# Altium PCB CanSat ADCS.PcbDoc
Units mm, origin at the board's own origin, x right, y up, seen from the top; angles counter-clockwise.
Board outline 50 x 50 mm, 4 copper layers (Top Layer, Ground, Power, Bottom Layer), stack 1.641 mm thick; 49 components, 53 nets, 273 pads, 89 vias.
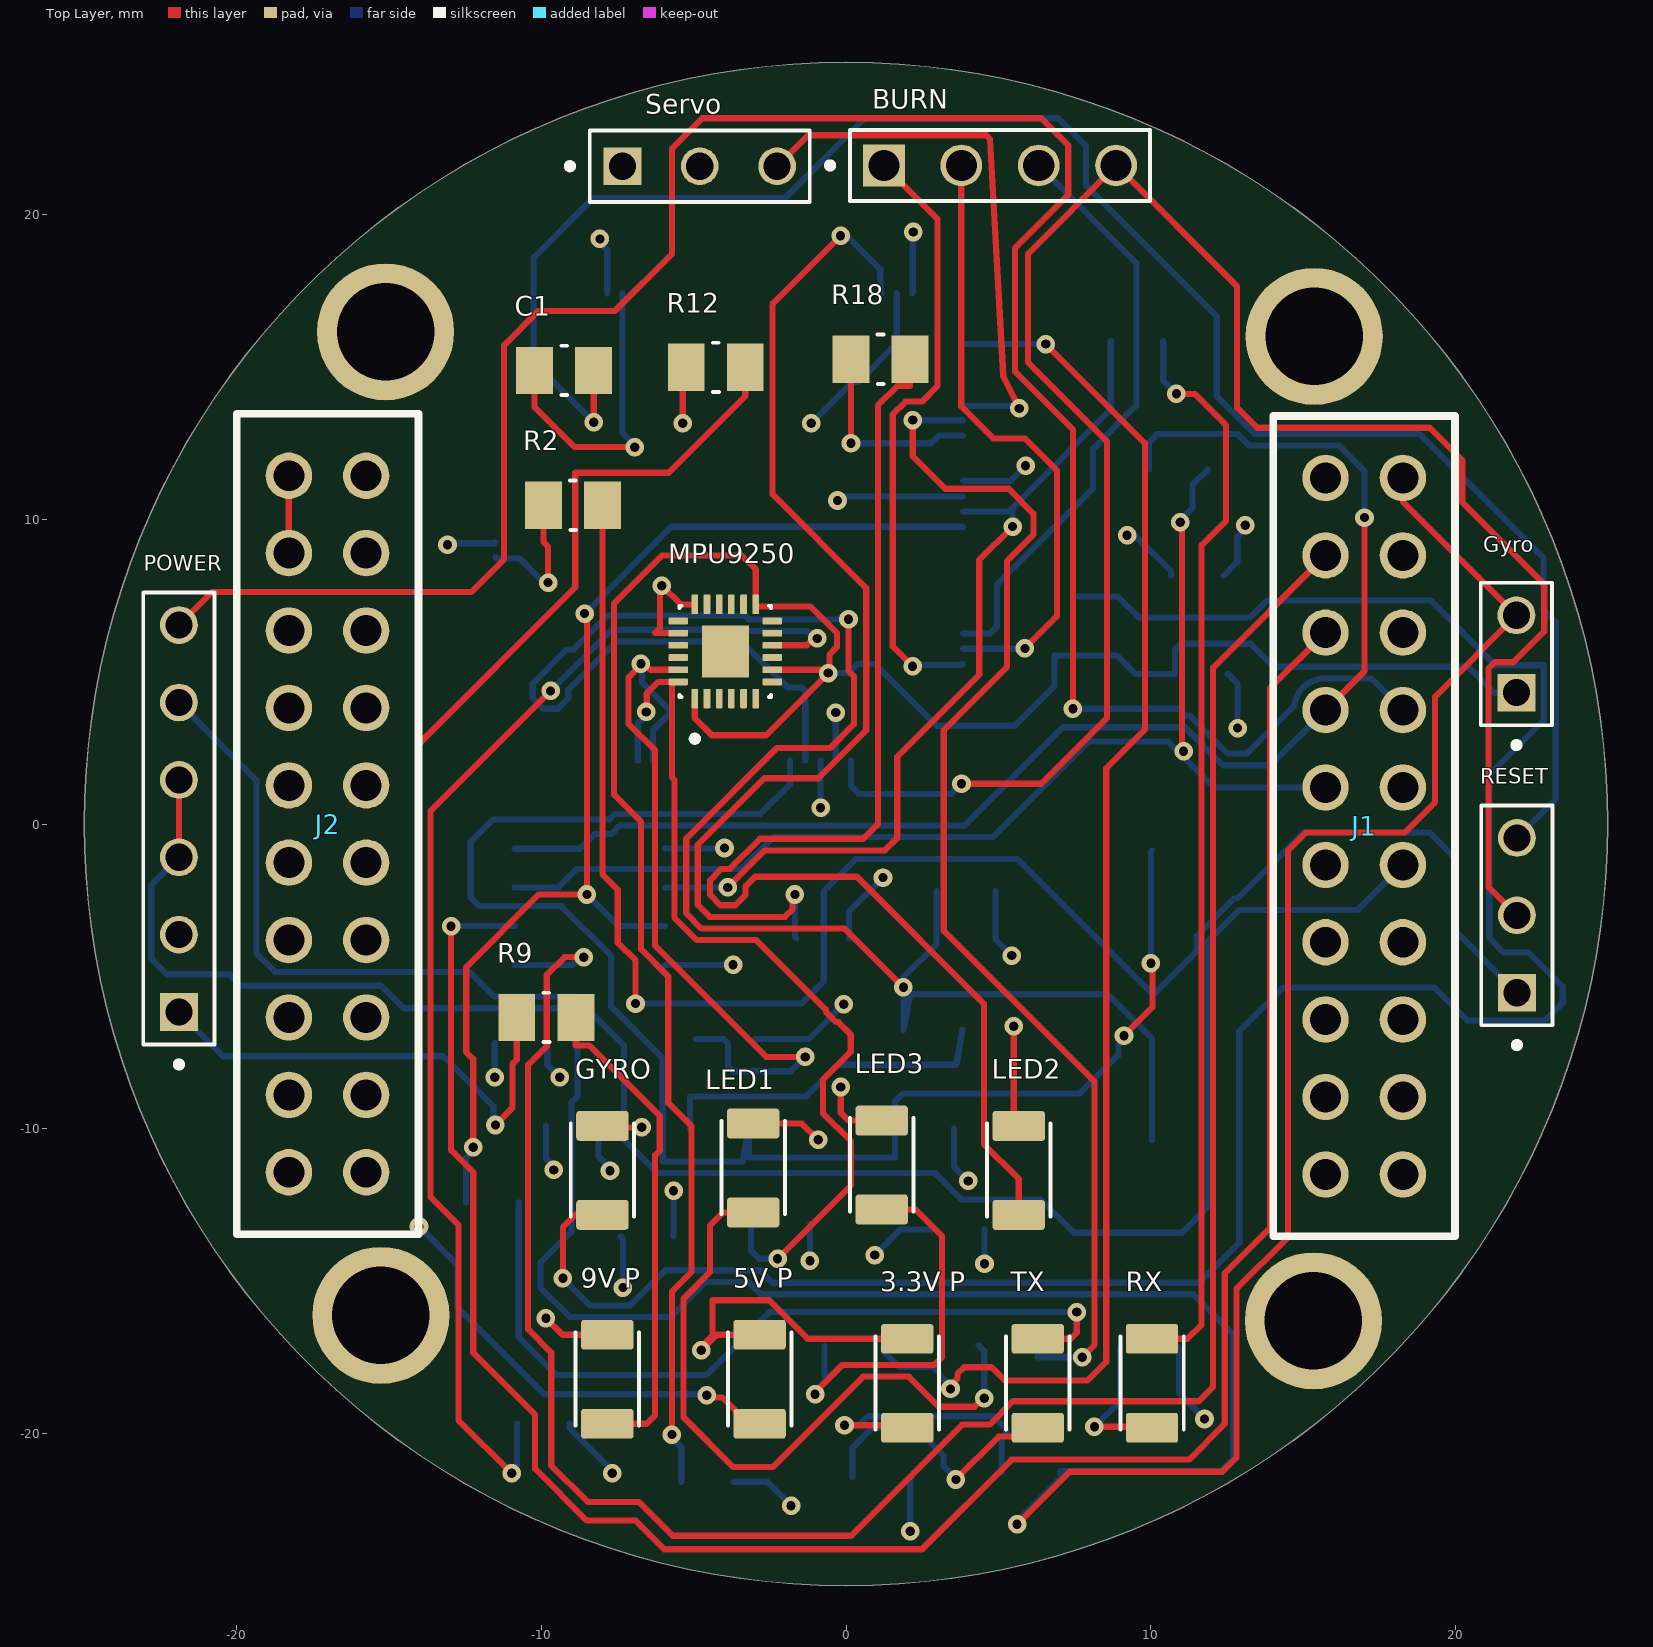
[diagram p0: Top Layer view]
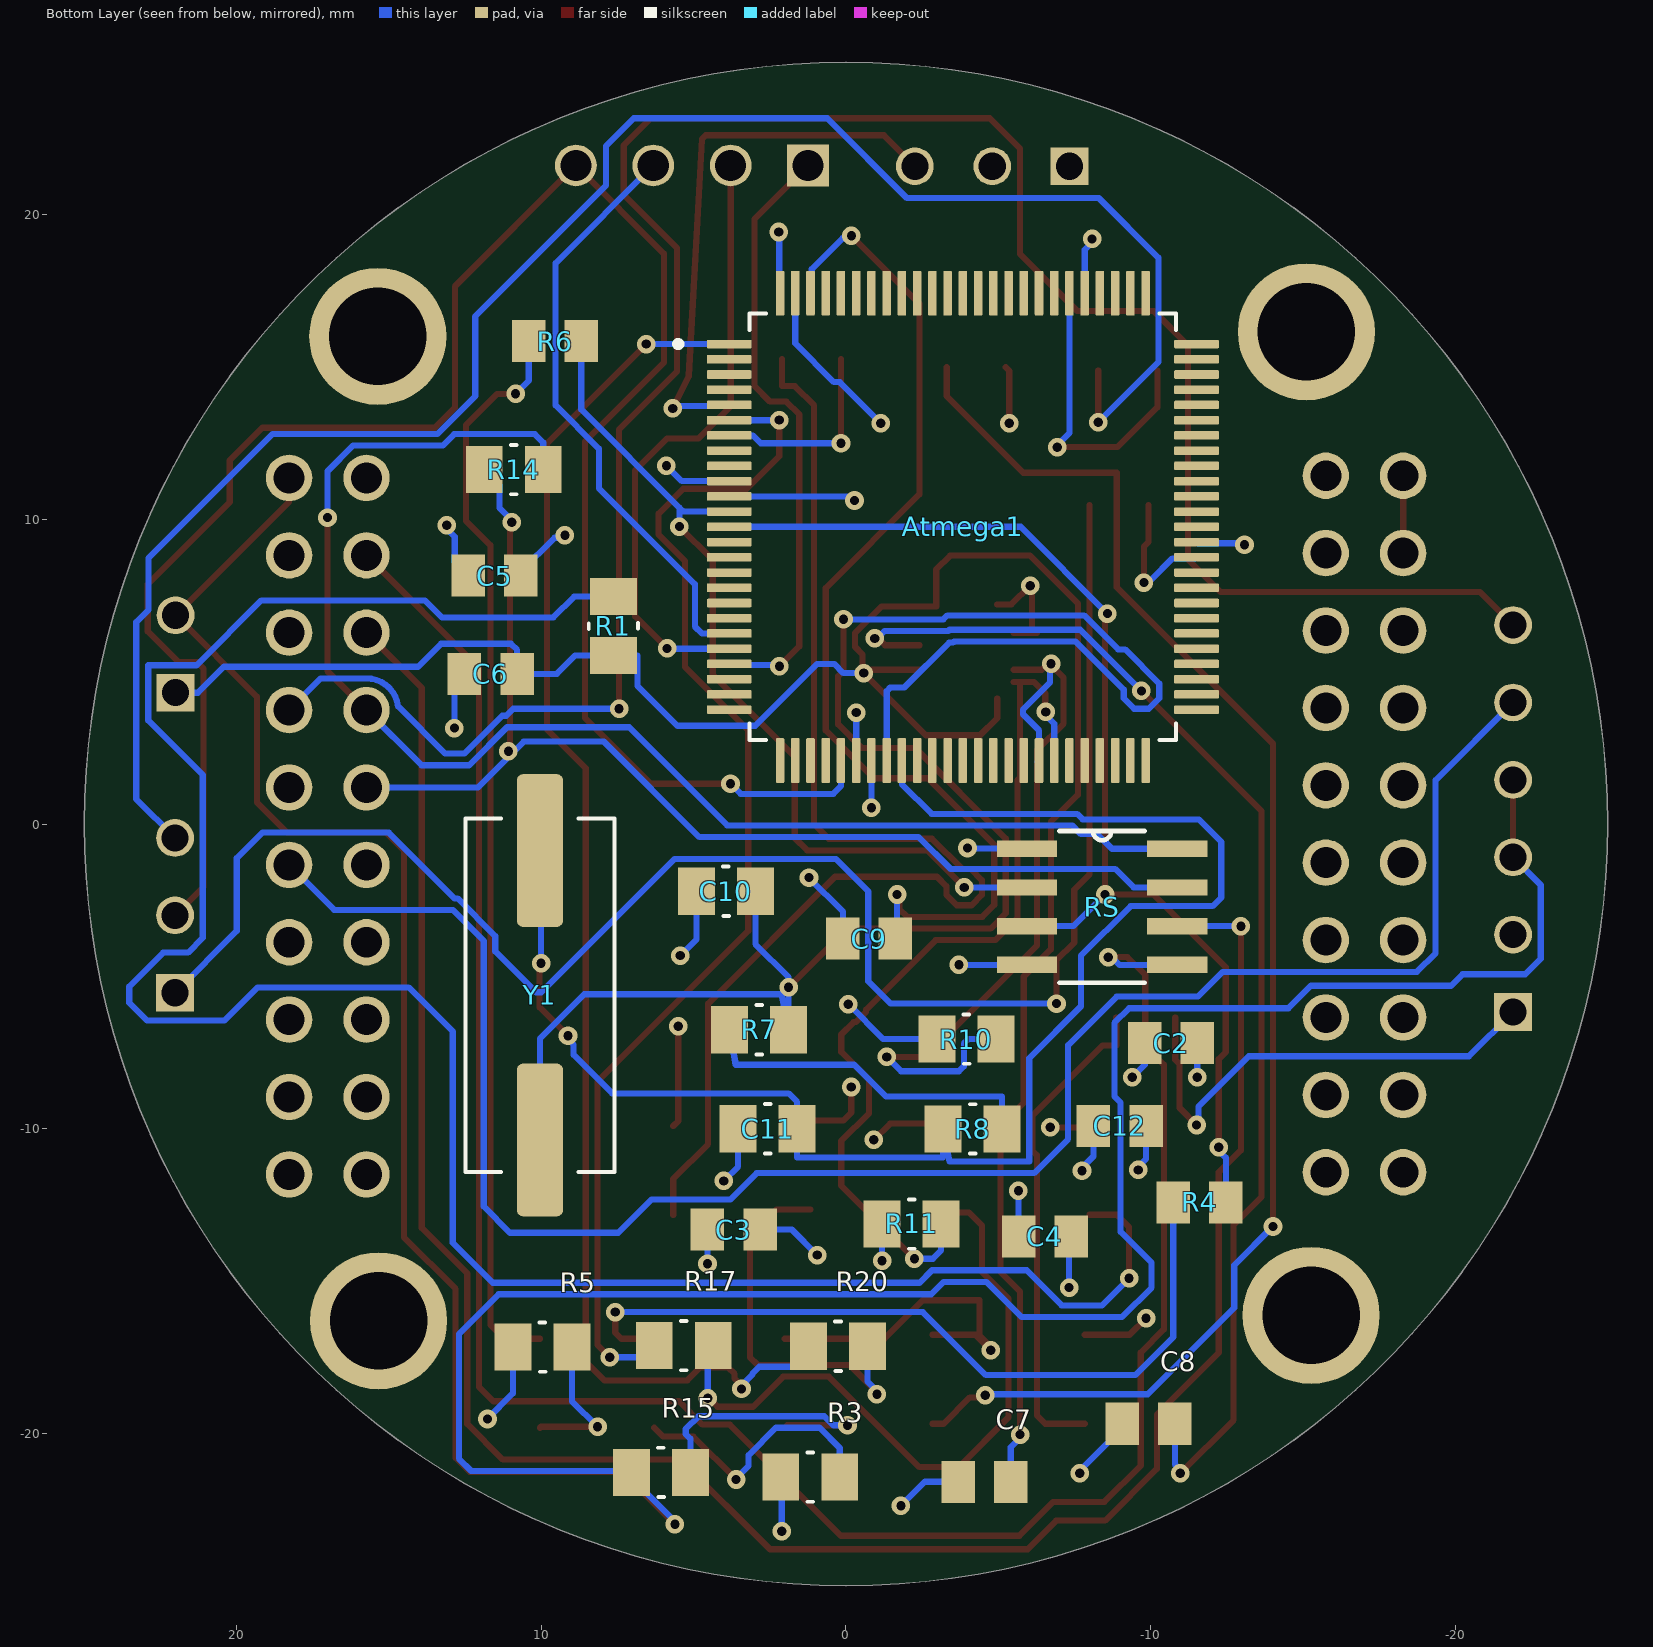
[diagram p1: Bottom Layer view, seen from below]
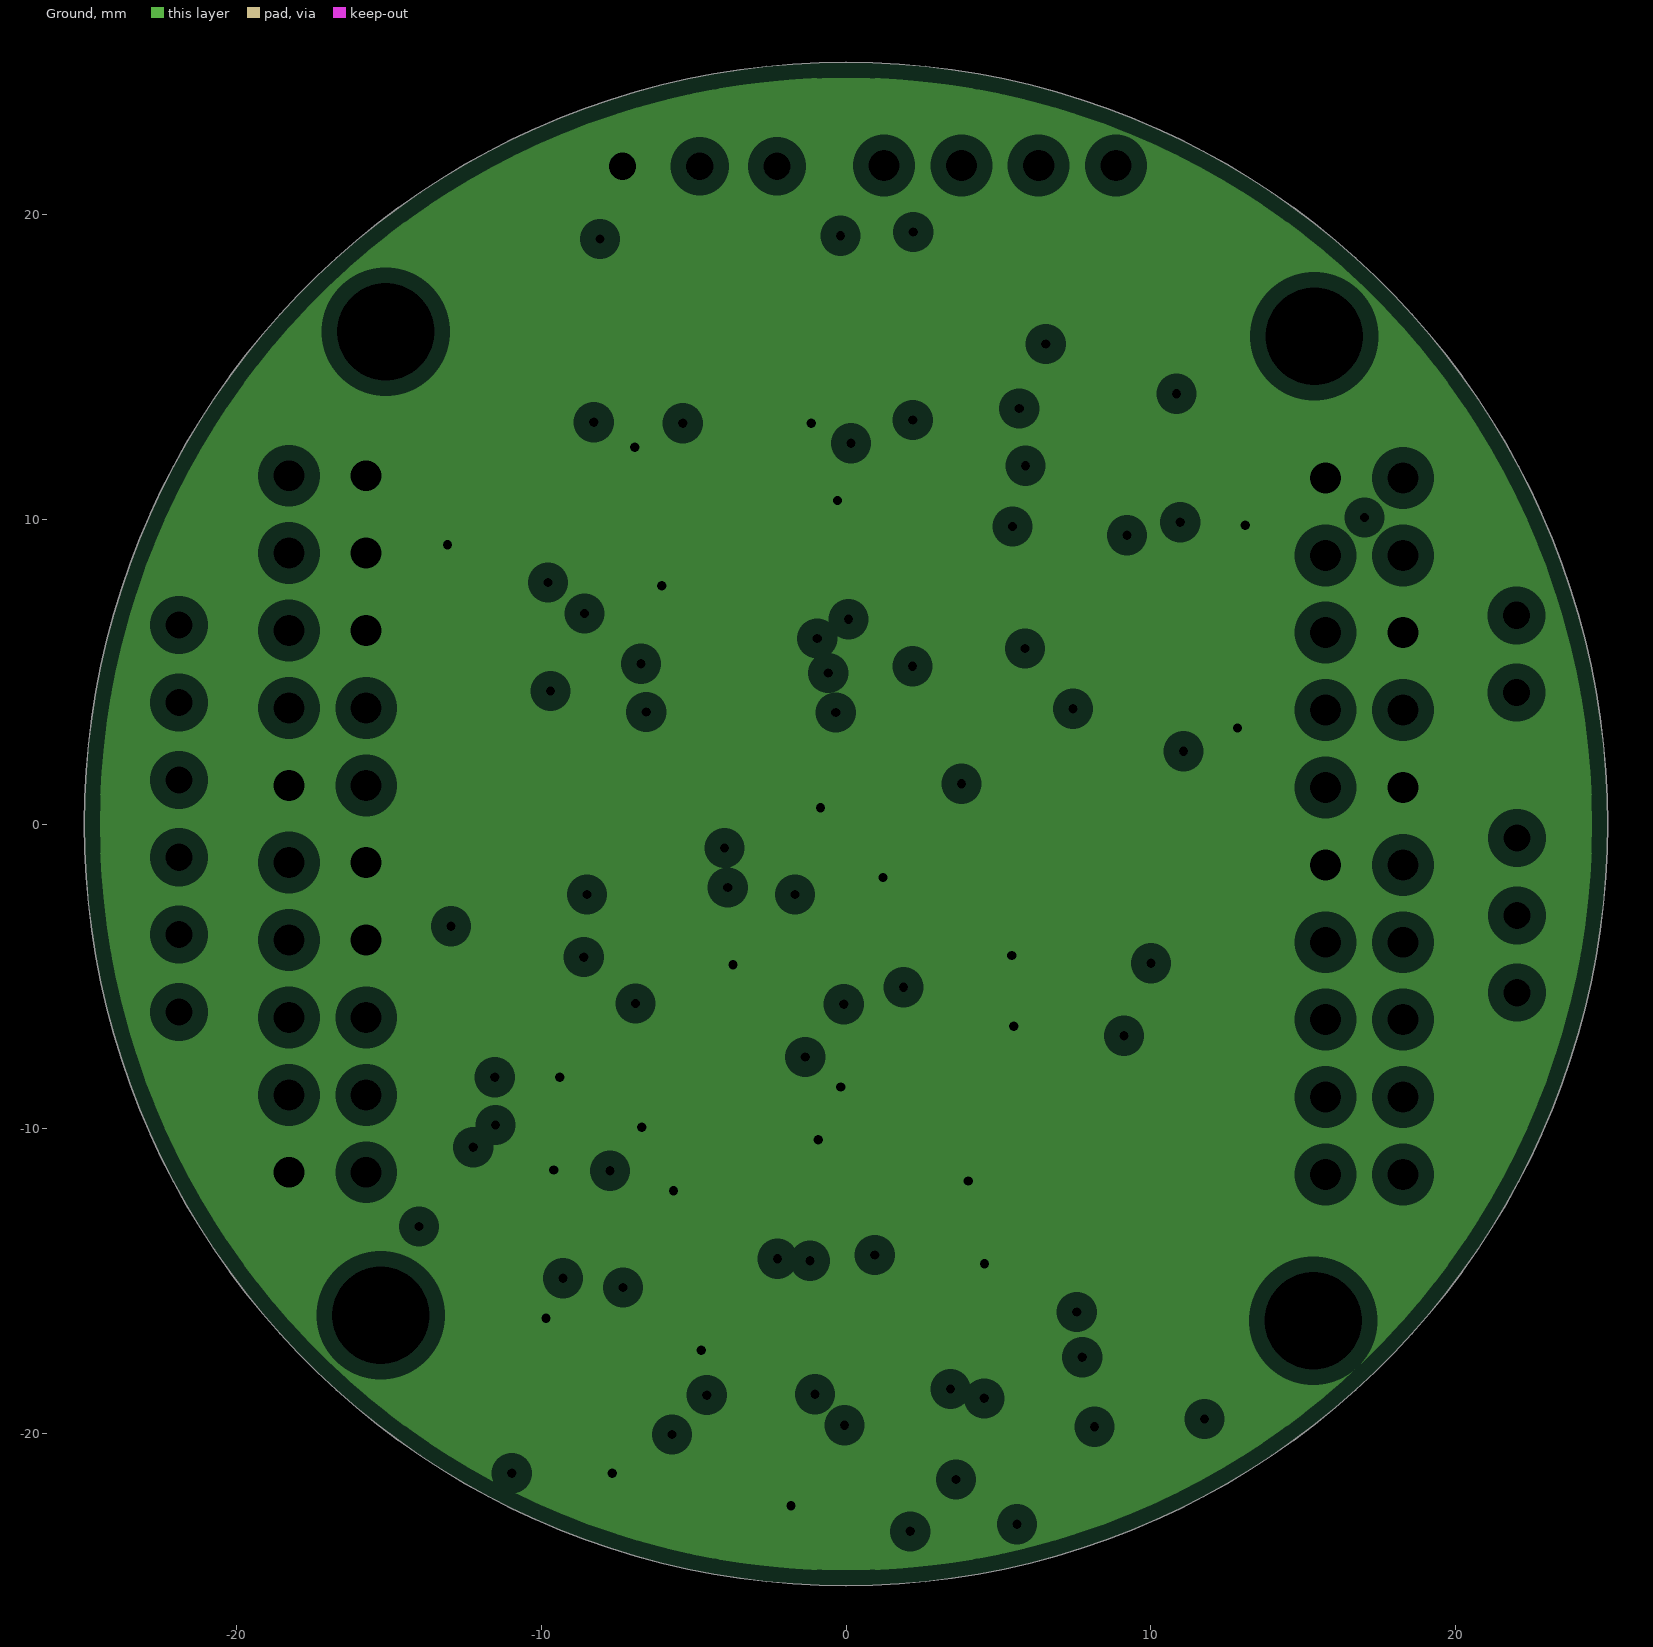
[diagram p2: Ground, clearances drawn from the general rule]
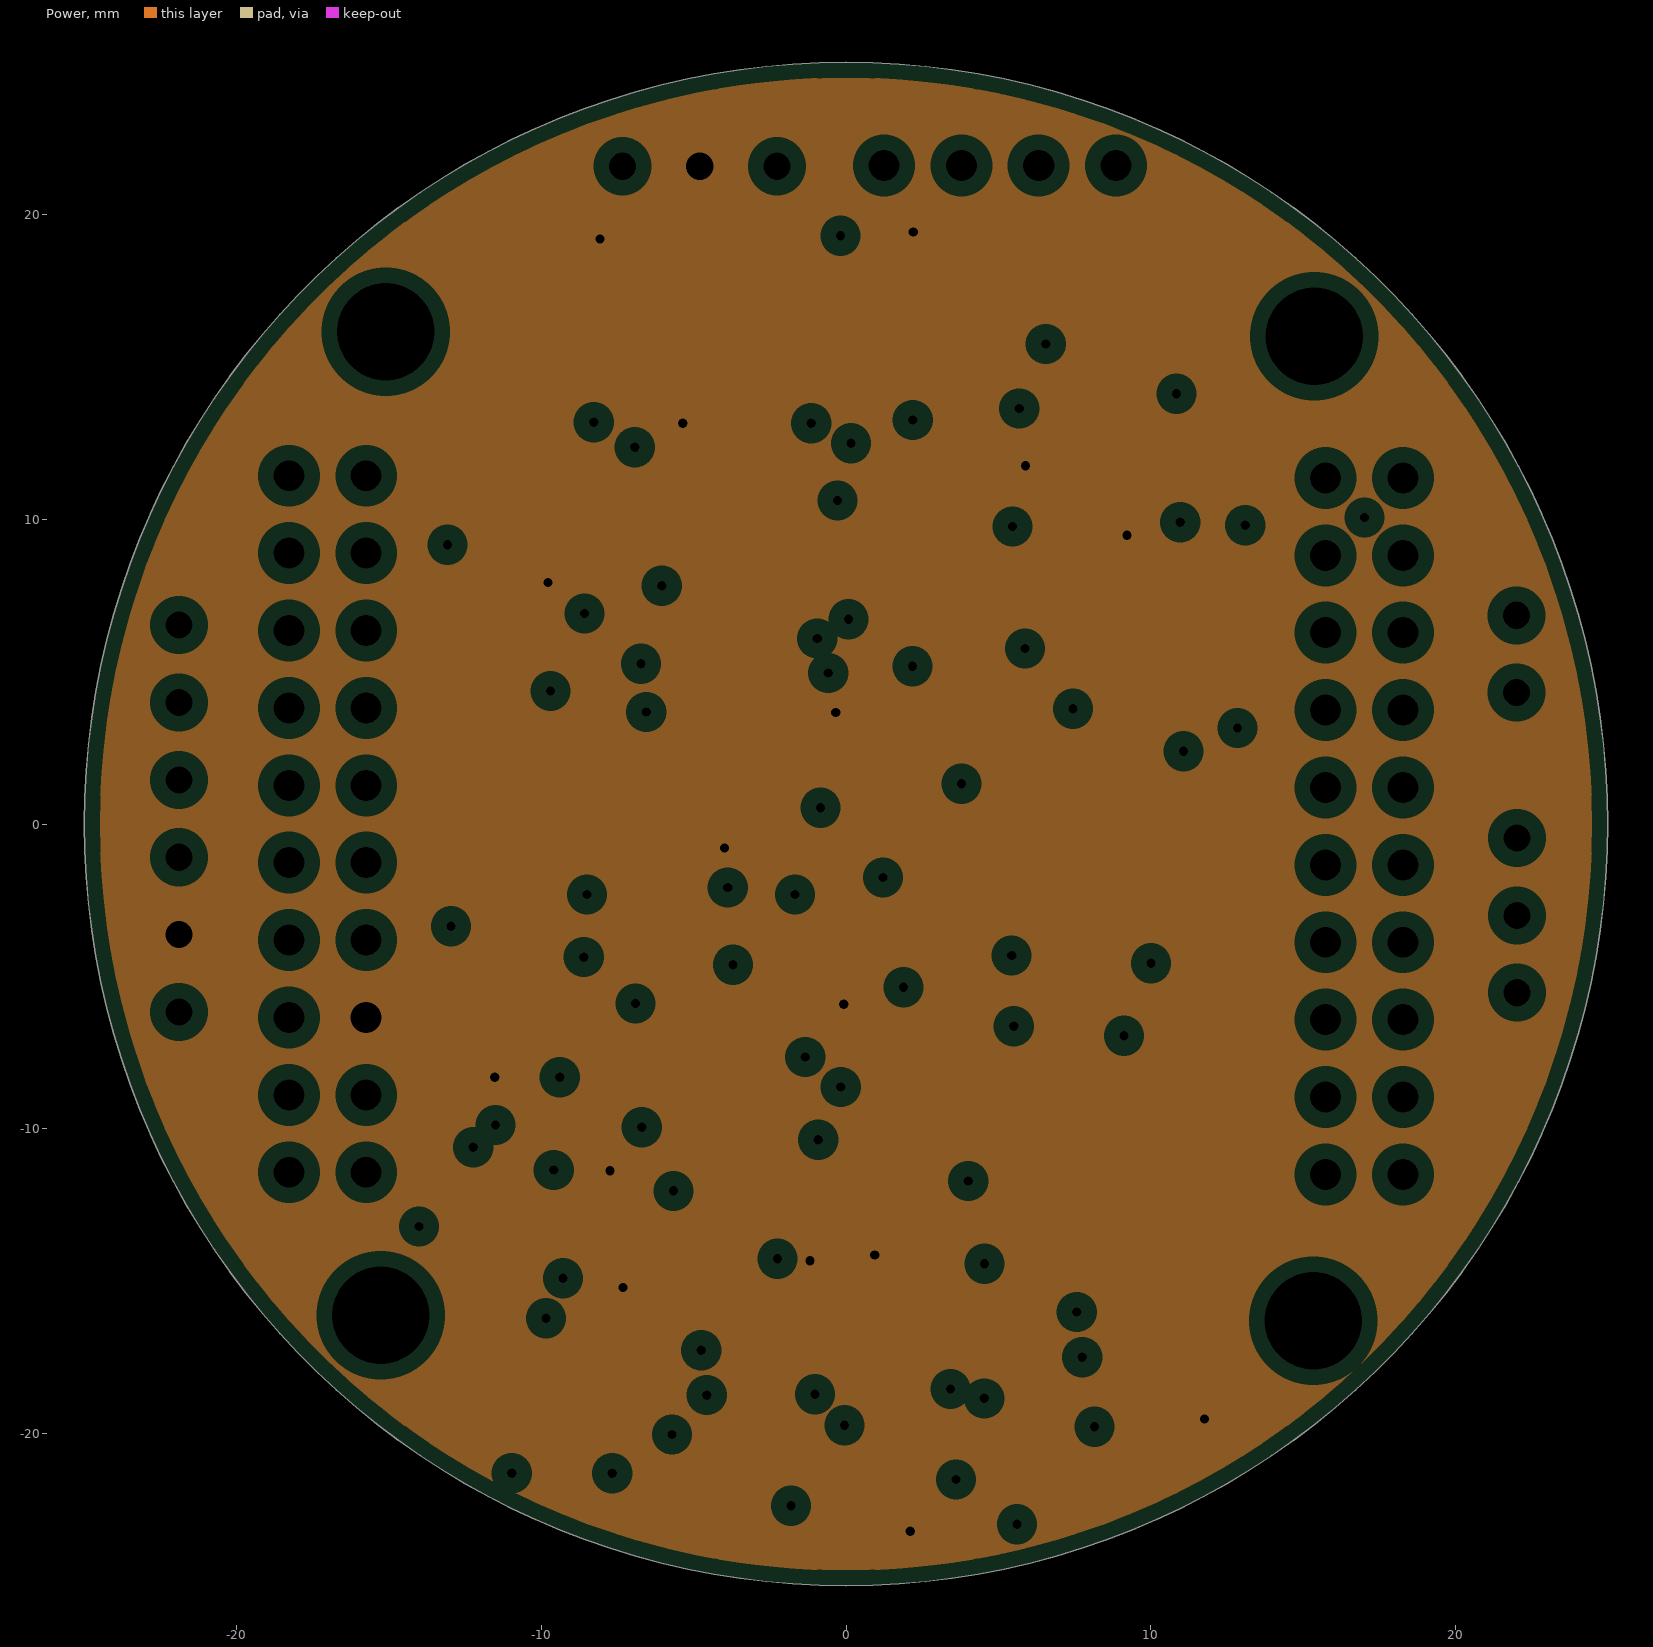
[diagram p3: Power, clearances drawn from the general rule]
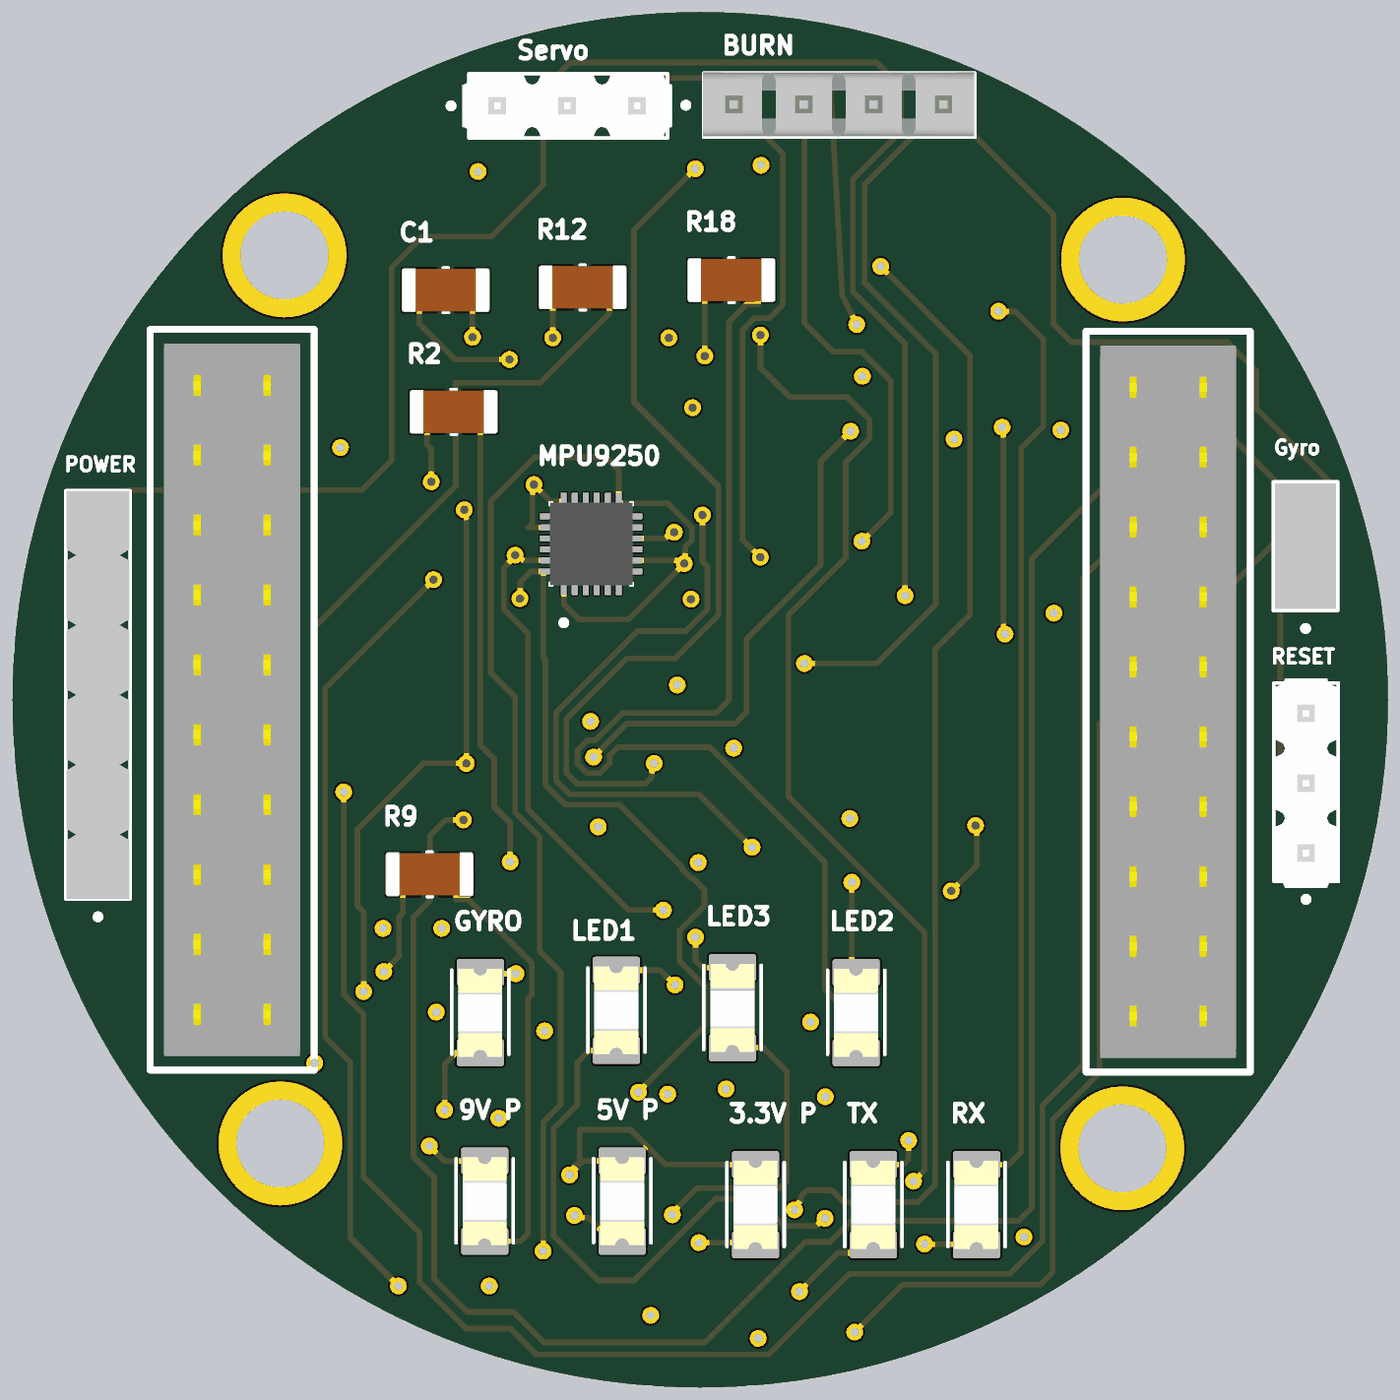
[diagram p4: 3D render of the assembled board from above, using the file's embedded part models]
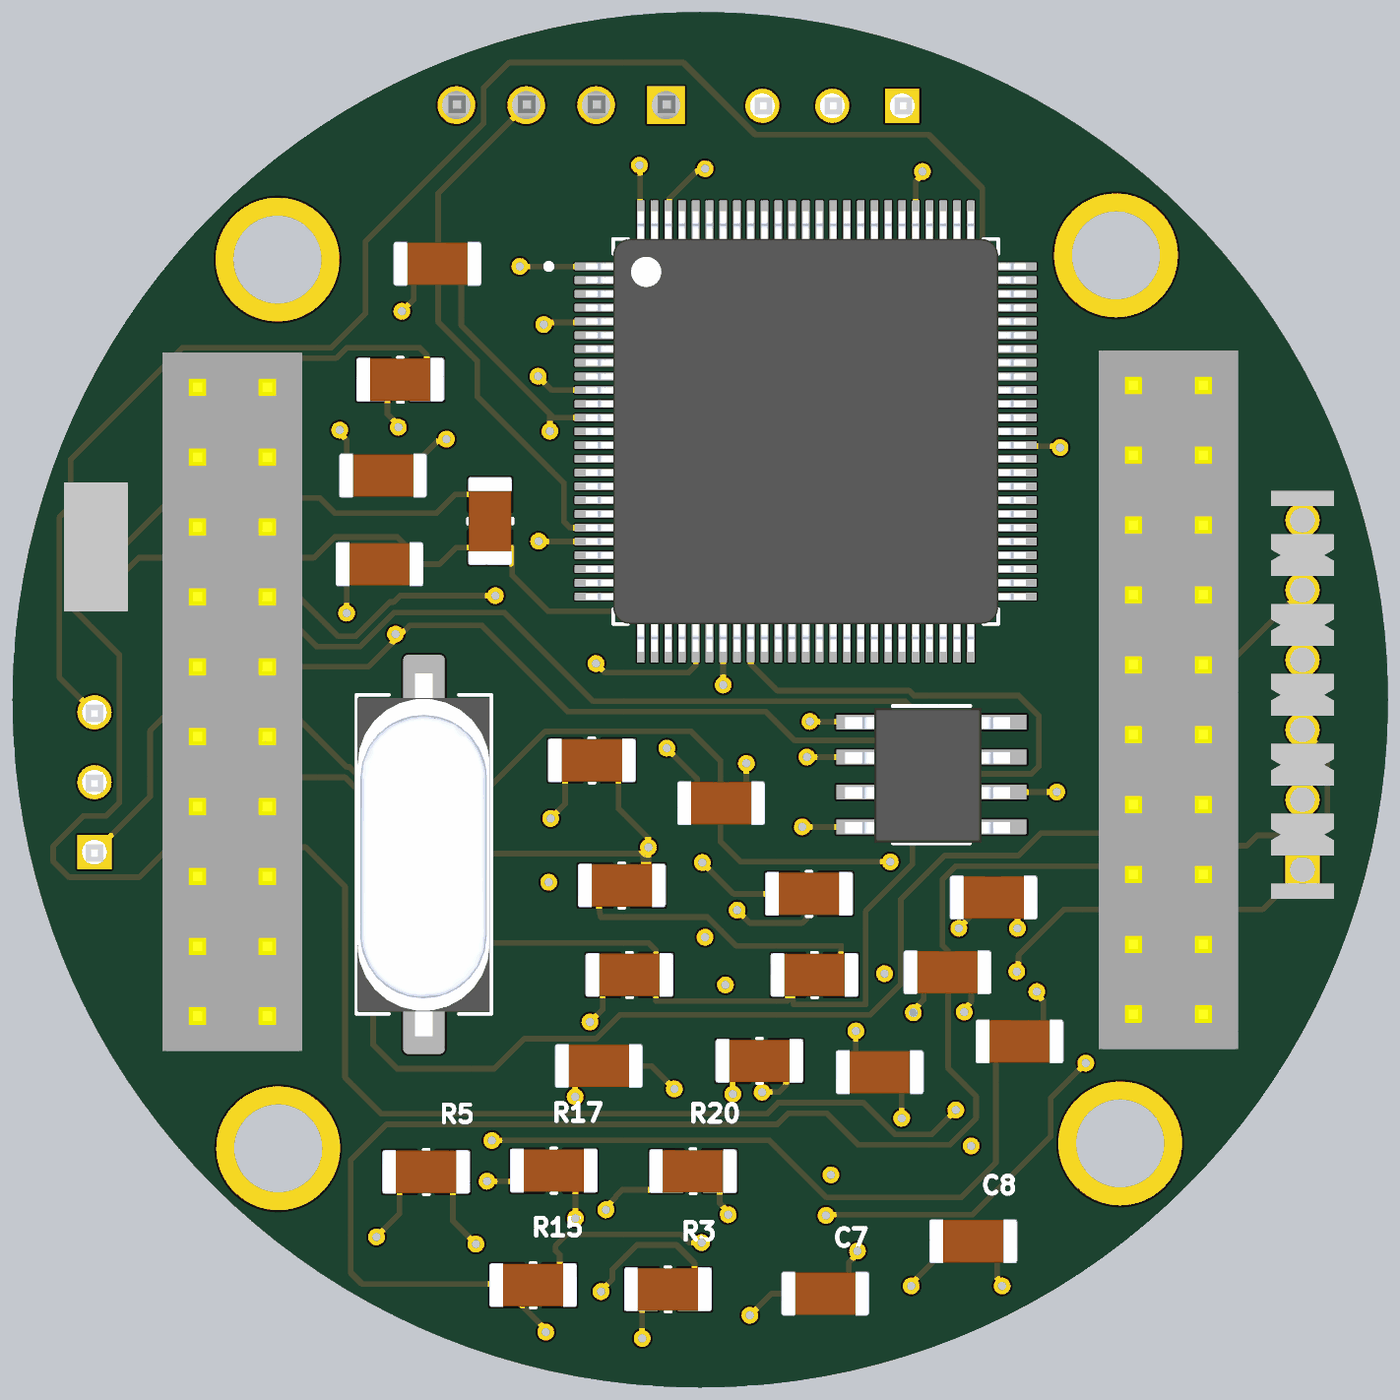
[diagram p5: 3D render of the assembled board from below, using the file's embedded part models]

## Layer stack, top to bottom
Top Solder: solder mask 0.0102, Solder Resist, Dk 3.5
Top Layer: signal copper 0.0356
Dielectric 1: prepreg 0.1702, FR-4, Dk 4.35
Ground: plane copper 0.0178, net G
Dielectric 3: core 1.1938, FR-4, Dk 4.35
Power: plane copper 0.0178, net VCC-5V(ADCS)
Dielectric 2: prepreg 0.1702, FR-4, Dk 4.35
Bottom Layer: signal copper 0.0356
Bottom Solder: solder mask 0.0102, Solder Resist, Dk 3.5

## Board outline
-0.001,-25 cw(c-0.001,0) -25.001,0 cw(c-0.001,0) -0.001,25 cw(c-0.001,0) 24.999,0 cw(c-0.001,0)

## Design rules (kind name [scope] priority, off if disabled: settings)
Clearance [All] p1: gap=0.178 ignorepadtopadclearanceinfootprint=FALSE except(0: Arc-Hole Track-Hole SMDPad-Hole THPad-Hole Via-Hole Fill-Hole Poly-Hole Region-Hole Text-Hole)
ComponentClearance [All] p1: gap=0.762 collisioncheckmode=3 verticalgap=0.762 showdistances=FALSE
DiffPairsRouting [All] p1: maxlimit=0.254 minlimit=0.254 mostfreqgap=0.254 toplayer_minwidth=0.381 toplayer_maxwidth=0.381 toplayer_prefwidth=0.381 bottomlayer_minwidth=0.381 bottomlayer_maxwidth=0.381 bottomlayer_prefwidth=0.381 substack1={0761D619-B0FF-4D42-81BD-1B94FE1A46B2} toplayer_{0761d619-b0ff-4d42-81bd-1b94fe1a46b2}_minwidth=0.381 toplayer_{0761d619-b0ff-4d42-81bd-1b94fe1a46b2}_maxwidth=0.381 toplayer_{0761d619-b0ff-4d42-81bd-1b94fe1a46b2}_prefwidth=0.381 bottomlayer_{0761d619-b0ff-4d42-81bd-1b94fe1a46b2}_minwidth=0.381 bottomlayer_{0761d619-b0ff-4d42-81bd-1b94fe1a46b2}_maxwidth=0.381 bottomlayer_{0761d619-b0ff-4d42-81bd-1b94fe1a46b2}_prefwidth=0.381 maxuncoupledlength=12.7
HoleSize [All] p1: absolutevalues=TRUE maxlimit=3.302 minlimit=0.025 maxpercent=80.000 minpercent=20.000
HoleToHoleClearance [All] p1: gap=0.152 allowstackedmicrovias=TRUE
MinimumSolderMaskSliver [All] p1: minsoldermaskwidth=0.076
PlaneClearance [All] p1: clearance=0.508
PlaneConnect [All] p1: planeconnectstyle=Relief reliefexpansion=0.508 reliefentries=4 reliefconductorwidth=0.254 reliefairgap=0.254
PolygonConnect [All] p1: connectstyle=Relief reliefconductorwidth=0.254 reliefentries=4 polygonreliefangle="90 Angle" airgapwidth=0.254
RoutingVias [All] p1: holewidth=0.305 width=0.61 viastyle="Through Hole" minholewidth=0.254 minwidth=0.254 maxholewidth=0.305 maxwidth=0.61
SilkToSilkClearance [All] p1: silktosilkclearance=0.102
SilkToSolderMaskClearance [IsPad] p1: minsilkscreentomaskgap=0.102 clearancetoexposedcopper=TRUE
SolderMaskExpansion [All] p1: expansion=0.076 istentingtop=FALSE
Width [All] p1: maxlimit=1.016 minlimit=0.178 preferedwidth=0.203 substack1={0761D619-B0FF-4D42-81BD-1B94FE1A46B2} toplayer_{0761d619-b0ff-4d42-81bd-1b94fe1a46b2}_prefwidth=0.305 bottomlayer_{0761d619-b0ff-4d42-81bd-1b94fe1a46b2}_prefwidth=0.305 minimp=50.000000 maximp=50.000000 favimp=50.000000
21 further rules are at their usual default settings.

## Components (designator, comment, footprint, x,y, rotation, side; value= is the part's Value field where it differs from the comment)
"3.3V P" "(1206) RED" RESC3015X65-01 2.007,-18.339 r90 top
"5V P" "(1206) Blue" RESC3015X65-01 -2.839,-18.206 r90 top
"9V P" "(1206) white" RESC3015X65-01 -7.839,-18.206 r90 top
Atmega1 "" QFP50P1600X1600X120-100N -3.835,9.754 r180 bottom
BURN "4 Position PinHeader 1Row" TE_3-644456-4 1.245,21.615 r0 top
C1 "(1206) 22pF" CAPC3216X125N0 -9.271,14.935 r0 top
C2 "(0805) 100nF" CAPC2012X95N-0 -10.669,-7.188 r180 bottom
C3 "(0805) 100nF" CAPC2012X95N-0 3.683,-13.31 r180 bottom
C4 "(0805) 100nF" CAPC2012X95N-0 -6.528,-13.538 r180 bottom
C5 "(0805) 100nF" CAPC2012X95N-0 11.532,8.153 r180 bottom
C6 "(0805) 10nF" CAPC2012X95N-0 11.659,4.928 r180 bottom
C7 "(0805) 100nF" CAPC2012X95N-0 -4.547,-21.59 r180 bottom
C8 "(0805) 100nF" CAPC2012X95N-0 -9.931,-19.685 r180 bottom
C9 "(0805) 100nF" CAPC2012X95N-0 -0.762,-3.759 r180 bottom
C10 "(1206) 22pF" CAPC3216X125N0 3.96,-2.159 r180 bottom
C11 "(1206) 22pF" CAPC3216X125N0 2.591,-9.957 r180 bottom
C12 "(0805) 100nf" CAPC2012X95N-0 -8.987,-9.908 r180 bottom
Gyro "2 Position PinHeader" TE_2-103327-2 22.022,5.537 r90 top (schematic designator "Gyro PW")
GYRO "(1206) GREEN" RESC3015X65-01 -7.998,-11.349 r90 top
J1 "20 Position Elevated Socket Connector" ESQ-110-XX-X-D 17.008,-0.071 r90 top
J2 "20 Position Elevated Socket Connector" ESQ-110-XX-X-D -17.018,0 r90 top
LED1 "(1206) Yellow" RESC3015X65-01 -3.052,-11.272 r90 top
LED2 "(1206) RED" RESC3015X65-01 5.664,-11.354 r90 top
LED3 "(1206) Green" RESC3015X65-01 1.168,-11.176 r90 top
MPU9250 "MPU-9250" QFN40P300X300X105-25N -3.962,5.664 r90 top
POWER "6 Position PinHeader 1Row" TE_6-146285-6 -21.895,-6.172 r90 top
R1 "(1206) 65" CAPC3216X125N0 7.682,6.477 r90 bottom
R2 "(1206) 10k" CAPC3216X125N0 -8.981,10.512 r0 top
R3 "(1206) 150" CAPC3216X125N0 1.192,-21.387 r180 bottom
R4 "(0805) 1K" CAPC2012X95N-0 -11.608,-12.421 r180 bottom
R5 "(1206) 85" CAPC3216X125N0 9.98,-17.12 r180 bottom
R6 "(0805) 1K" CAPC2012X95N-0 9.55,15.85 r180 bottom
R7 "(1206) 510K" CAPC3216X125N0 2.87,-6.706 r180 bottom
R8 "(1206) 510K" CAPC3216X125N0 -4.138,-9.959 r180 bottom
R9 "(1206) 300" CAPC3216X125N0 -9.855,-6.299 r0 top
R10 "(1206) 10K" CAPC3216X125N0 -3.937,-7.01 r180 bottom
R11 "(1206) 10K" CAPC3216X125N0 -2.136,-13.081 r180 bottom
R12 "(1206) 85" CAPC3216X125N0 -4.293,15.037 r0 top
R14 "(1206) 120" CAPC3216X125N0 10.924,11.681 r180 bottom
R15 "(1206) 65" CAPC3216X125N0 6.094,-21.234 r180 bottom
R17 "(1206) 150" CAPC3216X125N0 5.342,-17.072 r180 bottom
R18 "(1206) 150" CAPC3216X125N0 1.115,15.301 r0 top
R20 "(1206) 150" CAPC3216X125N0 0.279,-17.094 r180 bottom
RESET "3 Position PinHeader 1Row" TE_3-103327-3 22.022,-5.537 r90 top
RS "MAX488ESA+" SOIC127P600X175-8N0 -8.407,-2.718 r180 bottom
RX "(1206) Blue" RESC3015X65-01 10.04,-18.339 r90 top
Servo "3 Position PinHeader 1Row" TE_3-103327-3 -7.341,21.59 r0 top
TX "(1206) Green" RESC3015X65-01 6.289,-18.339 r90 top
Y1 "Crystal-16MHZ" XTAL1140X490X430N-0 10.004,-5.613 r90 bottom

## Footprints (in the part's own frame and the unit in brackets; to place one, negate y for a bottom-side part, rotate by r counter-clockwise, add the part's x,y. Pads: shape width x height; smd on the part's side, far side on the other; paste and mask are expansions set on the pad)
CAPC2012X95N-0 [mm]
  rect 1.1x1.38 smd: 1(-0.863,0) 2(0.863,0)
  body extent -1.6,-0.8 1.6,0.8, height 1.2
CAPC3216X125N0 [mm]
  rect 1.21x1.55 smd: 1(-0.95,-0.048) 2(0.987,-0.048)
  silkscreen extent -0.08,-0.86 0.12,0.76, body extent -1.58,-0.84 1.62,0.76, height 1.25
ESQ-110-XX-X-D [mil]
  round 60 hole 40: 1(-450,50) 2(-450,-50) 3(-350,50) 4(-350,-50) 5(-250,50) 6(-250,-50) 7(-150,50) 8(-150,-50) 9(-50,50) 10(-50,-50) 11(50,50) 12(50,-50) 13(150,50) 14(150,-50) 15(250,50) 16(250,-50) 17(350,50) 18(350,-50) 19(450,50) 20(450,-50)
  silkscreen extent -530,-117 530,117, body extent -510,-100 510,100, height 329
QFN40P300X300X105-25N [mm]
  rrect25% 0.64x0.22 smd mask+0.05: 1(-1.545,1) 2(-1.545,0.6) 3(-1.545,0.2) 4(-1.545,-0.2) 5(-1.545,-0.6) 6(-1.545,-1) 13(1.545,-1) 14(1.545,-0.6) 15(1.545,-0.2) 16(1.545,0.2) 17(1.545,0.6) 18(1.545,1)
  rrect25% 0.22x0.64 smd mask+0.05: 7(-1,-1.545) 8(-0.6,-1.545) 9(-0.2,-1.545) 10(0.2,-1.545) 11(0.6,-1.545) 12(1,-1.545) 19(1,1.545) 20(0.6,1.545) 21(0.2,1.545) 22(-0.2,1.545) 23(-0.6,1.545) 24(-1,1.545)
  rect 1.7x1.54 smd paste-2: 25(0,0)
  silkscreen extent -2.96,-1.5 1.5,1.5, body extent -1.5,-1.5 1.5,1.5, height 1
QFP50P1600X1600X120-100N [mm]
  rrect25% 1.47x0.28 smd mask+0.05: 1(-7.67,6) 2(-7.67,5.5) 3(-7.67,5) 4(-7.67,4.5) 5(-7.67,4) 6(-7.67,3.5) 7(-7.67,3) 8(-7.67,2.5) 9(-7.67,2) 10(-7.67,1.5) 11(-7.67,1) 12(-7.67,0.5) 13(-7.67,0) 14(-7.67,-0.5) 15(-7.67,-1) 16(-7.67,-1.5) 17(-7.67,-2) 18(-7.67,-2.5) 19(-7.67,-3) 20(-7.67,-3.5) 21(-7.67,-4) 22(-7.67,-4.5) 23(-7.67,-5) 24(-7.67,-5.5) 25(-7.67,-6) 51(7.67,-6) 52(7.67,-5.5) 53(7.67,-5) 54(7.67,-4.5) 55(7.67,-4) 56(7.67,-3.5) 57(7.67,-3) 58(7.67,-2.5) 59(7.67,-2) 60(7.67,-1.5) 61(7.67,-1) 62(7.67,-0.5) 63(7.67,0) 64(7.67,0.5) 65(7.67,1) 66(7.67,1.5) 67(7.67,2) 68(7.67,2.5) 69(7.67,3) 70(7.67,3.5) 71(7.67,4) 72(7.67,4.5) 73(7.67,5) 74(7.67,5.5) 75(7.67,6)
  rrect25% 0.28x1.47 smd mask+0.05: 26(-6,-7.67) 27(-5.5,-7.67) 28(-5,-7.67) 29(-4.5,-7.67) 30(-4,-7.67) 31(-3.5,-7.67) 32(-3,-7.67) 33(-2.5,-7.67) 34(-2,-7.67) 35(-1.5,-7.67) 36(-1,-7.67) 37(-0.5,-7.67) 38(0,-7.67) 39(0.5,-7.67) 40(1,-7.67) 41(1.5,-7.67) 42(2,-7.67) 43(2.5,-7.67) 44(3,-7.67) 45(3.5,-7.67) 46(4,-7.67) 47(4.5,-7.67) 48(5,-7.67) 49(5.5,-7.67) 50(6,-7.67) 76(6,7.67) 77(5.5,7.67) 78(5,7.67) 79(4.5,7.67) 80(4,7.67) 81(3.5,7.67) 82(3,7.67) 83(2.5,7.67) 84(2,7.67) 85(1.5,7.67) 86(1,7.67) 87(0.5,7.67) 88(0,7.67) 89(-0.5,7.67) 90(-1,7.67) 91(-1.5,7.67) 92(-2,7.67) 93(-2.5,7.67) 94(-3,7.67) 95(-3.5,7.67) 96(-4,7.67) 97(-4.5,7.67) 98(-5,7.67) 99(-5.5,7.67) 100(-6,7.67)
  silkscreen extent -9.44,-7 7,7, body extent -8,-8 8,8, height 1.12
RESC3015X65-01 [mm]
  rrect20% 0.98x1.72 smd: 1(-1.479,-0.004) 2(1.441,-0.004)
  silkscreen extent -1.54,-1.04 1.52,1.04, body extent -1.63,-0.8 1.57,0.8, height 1.1
SOIC127P600X175-8N0 [mil]
  rect 78x21 smd: 1(-97,75) 2(-97,25) 3(-97,-25) 4(-97,-75) 5(97,-75) 6(97,-25) 7(97,25) 8(97,75)
  silkscreen extent -55,-98 55,98, body extent -124,-97 113,95, height 67
TE_2-103327-2 [mm]
  rect 1.24x1.24 hole 0.89: 1(-1.227,0.018)
  round 1.24 hole 0.89: 2(1.313,0.018)
  silkscreen extent -3.05,-1.15 2.38,1.19, body extent -2.32,-1.11 2.36,1.22, height 5.84
TE_3-103327-3 [mm]
  rect 1.24x1.24 hole 0.89: 1(0,0)
  round 1.24 hole 0.89: 2(2.54,0) 3(5.08,0)
  silkscreen extent -1.82,-1.17 6.15,1.17, body extent -1.31,-1.2 6.31,1.21, height 8.18
TE_3-644456-4 [mm]
  rect 1.37x1.37 hole 1.02: 1(0,0)
  round 1.37 hole 1.02: 2(2.54,0) 3(5.08,0) 4(7.62,0)
  silkscreen extent -1.87,-1.17 8.74,1.17, body extent -1.14,-1.14 8.72,1.19, height 10.03
TE_6-146285-6 [mm]
  rect 1.24x1.24 hole 0.89: 1(0,0)
  round 1.24 hole 0.89: 2(2.54,0) 3(5.08,0) 4(7.62,0) 5(10.16,0) 6(12.7,0)
  silkscreen extent -1.82,-1.17 13.77,1.17, body extent -1.07,-1.14 13.77,1.14, height 8.1
XTAL1140X490X430N-0 [mm]
  rrect25% 5.01x1.51 smd: 1(-4.757,0.04) 2(4.743,0.04)
  silkscreen extent -5.81,-2.41 5.79,2.49, body extent -6.62,-2.35 6.58,2.45, height 4.3

## Part data
"3.3V P" "5V P" "9V P" GYRO LED1 LED2 LED3 RX TX: library part "LED 1206", "LED SMD 1206 High Quality Forward Voltage: 3.2 V / Brightness: 700 mcd", Emitting Color=Amber, Forward Voltage=2V, Manufacturer="Wurth Elektronik", Manufacturer Part Number=150060AS75003, Operating Temperature max.=100C, Operating Temperature min.=-40C, Chip Technology=AlInGaP, ComponentLink1Description="Manufacturer Link", ComponentLink1URL=http://www.we-online.de, ComponentLink2Description=Datasheet, ComponentLink2URL=https://www.we-online.com/catalog/datasheet/150060AS75003.pdf, Dominant Wavelength=605nm, Height=0.7mm, Length=1.6mm, Luminous Intensity=350mcd, Mounting Technology=SMT, Packaging="Tape and Reel", Peak Wavelength=610nm, Size=0603, Viewing Angle=140°, Width=0.8mm
Atmega1: library part ATMEGA2560-16AU, Package=None, Availability=Unavailable, MP=ATMEGA2560-16AU, Price=None
BURN: "Conn Unshrouded Header HDR 4 POS 2.54mm Solder ST Thru-Hole Bag/Box", Package=None, Availability=Warning, Centerline_Pitch="2.54 mm[.1 in]", DigiKey-Purchase-URL=https://snapeda.com/shop?store=DigiKey&id=482664, EU_RoHS_Compliance=Compliant, MF="TE Connectivity", Mouser-Purchase-URL=https://snapeda.com/shop?store=Mouser&id=482664, MP=3-644456-4, Number_of_Positions=4, Price=None, Product_Type=Connector, SnapEDA_Link=https://www.snapeda.com/parts/3-644456-4/TE%20Connectivity%20AMP%20Connectors/view-part/482664/?ref=snap
C1 C10 C11: library part "Capacitor 1206", "UMF316B7103KFHT/1206 Capacitor", Package=None, Availability=Unavailable, MP=UMF316B7103KFHT, Price=None
C2 C3 C4 C5 C6 C7 C8 C9 C12: library part "Capacitor 0805", "UMK212SD103KD-T/CAP CER 10000PF 50V 0805", Package=None, Availability=Unavailable, MP=UMK212SD103KD-T, Price=None
Gyro: "Cabezal del conector Agujero pasante 2 posiciones 0,100 (2,54 mm)", Package=None, Availability=Warning, Check_prices=https://www.snapeda.com/parts/4-103327-4/TE%20Connectivity%20AMP%20Connectors/view-part/2403998/?ref=eda, EU_RoHS_Compliance=Compliant, MF="TE Connectivity", MP=4-103327-4, Price=None, Purchase-URL=https://pricing.snapeda.com/search/part/4-103327-4/?ref=eda, SnapEDA_Link=https://www.snapeda.com/parts/4-103327-4/TE%20Connectivity%20AMP%20Connectors/view-part/2403998/?ref=snap
J1 J2: "20 Position Elevated Socket Connector Through Hole", Package=None, Availability=Unavailable, MF=Samtec, MP=ESQ-110-14-T-D, Price=None, SnapEDA_Link=https://www.snapeda.com/parts/ESQ-110-14-T-D/Samtec%20Inc./view-part/786056/?ref=snap
MPU9250: "MPU-9250 series Accelerometer, Gyroscope, Humidity, Magnetometer, Pressure, Temperature Sensor Evaluation Board", Package="TFQFN-24 TDK InvenSense", Availability="In Stock", Check_prices=https://www.snapeda.com/parts/MPU-9250/TDK+InvenSense/view-part/?ref=eda, MF="TDK InvenSense", MP=MPU-9250, Price=None, Purchase-URL=https://pricing.snapeda.com/search/part/MPU-9250/?ref=eda, SnapEDA_Link=https://www.snapeda.com/parts/MPU-9250/TDK+InvenSense/view-part/?ref=snap
POWER: "Connector Header Through Hole 6 position 0.100 (2.54mm)", Package=None, Digi-Key_Part_Number=A122872-ND, DigiKey-Purchase-URL=https://snapeda.com/shop?store=DigiKey&id=2411669, EU_RoHS_Compliance=Compliant, MF="TE Connectivity", MP=5-146285-6, SnapEDA_Link=https://www.snapeda.com/parts/5-146285-6/TE%20Connectivity%20AMP%20Connectors/view-part/2411669/?ref=snap
R1 R2 R3 R5 R7 R8 R9 R10 R11 R12 R14 R15 R17 R18 R20: library part "Resistor 1206"
R4 R6: library part "Resistor 0805"
RESET Servo: "Conn Unshrouded Header HDR 3 POS 2.54mm Solder ST Thru-Hole Carton", Package=None, Availability=Unavailable, EU_RoHS_Compliance=Compliant, MF="TE Connectivity", MP=4-103327-5, Price=None, SnapEDA_Link=https://www.snapeda.com/parts/4-103327-5/TE%20Connectivity%20AMP%20Connectors/view-part/2403997/?ref=snap, TE_purchase_URL=https://www.te.com/usa-en/product-4-103327-5.html?te_bu=Cor&te_type=disp&te_campaign=seda_glo_cor-seda-global-disp-prtnr-fy19-seda-model-bom-cta_sma-317_1&elqCampaignId=32493
RS: "1/1 Transceiver Full RS422, RS485 8-SOIC", Package="SOIC-8 Maxim", Availability=Unavailable, MF="Maxim Integrated", MP=MAX488ESA+T, Price=None, SnapEDA_Link=https://www.snapeda.com/parts/MAX488ESA+T/Maxim%20Integrated/view-part/48834/?ref=snap

## Free pads (board coordinates)
  round 4.5 hole 3.2 unplated: 1(15.367,16.002) 2(15.342,-16.307) 3(-15.265,-16.129) 4(-15.113,16.154)

## Via types
v1: diameter 0.61, hole 0.305, Top Layer to Bottom Layer, 89 vias

## Nets (pads, with @x,y where several pads share a name; then routed paths per layer and width w, separated by ;. In a path a pad name is that pad's centre, name@x,y a point inside that pad or via, vN(x,y) a via of type N, cw(c..) or ccw(c..) an arc to the next point about the centre after c; other vN are vias at no path point)
3.3V: Gyro.2 J1.20 POWER.3 POWER.4 R15.1 | length 114.4
  Top Layer w0.203: POWER.3 POWER.4 ; v1(5.613,-22.987) 7.339,-21.262 12.349,-21.262 12.812,-20.799 12.812,-15.259 14.508,-13.563 14.508,-0.865 15.092,-0.281 18.343,-0.281 19.334,0.709 19.334,4.181 Gyro.2 18.278,10.576 J1.20
  Bottom Layer w0.203: POWER.3 -22.805,-2.002 -22.805,-4.421 -22.297,-4.929 -20.239,-4.929 -19.86,-5.309 -15.263,-5.309 -14.524,-6.047 -9.292,-6.047 -8.809,-6.53 -8.809,-8.943 -9.012,-9.146 -9.012,-13.388 -10.028,-14.404 -10.028,-15.216 -9.064,-16.181 -5.76,-16.181 -4.61,-15.03 -3.204,-15.03 -2.798,-15.436 11.401,-15.436 12.705,-16.74 12.705,-20.83 12.298,-21.236 7.044,-21.236 7.044,-21.452 5.613,-22.882 v1(5.613,-22.987)
5V: J1.10 POWER.5 | length 62.6
  Bottom Layer w0.203: POWER.5 -19.35,1.443 -19.35,-4.244 -18.741,-4.853 -12.365,-4.853 -11.552,-5.666 -8.885,-5.666 -7.291,-7.261 -7.291,-10.34 -6.173,-11.457 2.926,-11.457 3.789,-12.321 6.38,-12.321 7.472,-13.413 11.028,-13.413 11.892,-12.549 11.892,-3.837 12.908,-2.821 16.798,-2.821 J1.10
9V: J1.14 POWER.6 | length 75.6
  Top Layer w0.203: POWER.6 -20.805,7.618 -12.289,7.618 -11.222,8.685 -11.222,15.721 -10.105,16.838 -7.59,16.838 -5.71,18.718 -5.71,22.172 -4.72,23.163 6.405,23.163 7.294,22.274 7.294,20.648 5.542,18.896 5.542,14.857 7.447,12.952 v1(7.447,3.783)
  Bottom Layer w0.203: v1(7.447,3.783) 10.924,3.783 11.152,3.554 11.284,3.554 12.527,2.311 13.157,2.311 14.703,3.858 cw(c15.738,3.739) 15.585,4.769 15.639,4.778 cw(c15.672,4.577) 15.672,4.781 17.237,4.781 J1.14
AREF: Atmega1.98 C9.2 | length 35.4
  Top Layer w0.203: v1(-1.676,-2.313) -1.754,-2.391 -1.754,-2.798 -2.006,-3.05 -4.471,-3.05 -4.864,-2.657 -4.864,-0.679 -2.683,1.501 -0.905,1.501 0.665,3.072 0.665,7.745 -2.408,10.819 -2.408,17.073 v1(-0.178,19.304)
  Bottom Layer w0.203: v1(-1.676,-2.313) -1.676,-3.708 C9.2 ; v1(-0.178,19.304) -0.1,19.226 0.112,19.226 1.126,18.212 1.126,17.462 Atmega1.98
CE: Atmega1.18
G: "3.3V P.2" "5V P.2" "9V P.2" Atmega1.11 Atmega1.32 Atmega1.62 Atmega1.81 Atmega1.99 C1.1 C2.1 C3.1 C4.1 C5.1 C6.1 C7.1 C8.1 C9.1 C10.1 C11.1 C12.2 GYRO.2 J1.9 J1.12 J1.16 J1.19 J2.1 J2.8 J2.10 J2.11 J2.16 J2.18 J2.20 LED1.2 LED2.2 LED3.2 MPU9250.18 MPU9250.20 RS.4 Servo.1 | length 71.9
  Top Layer w0.203: C1.1 -10.221,13.681 -8.91,12.37 v1(-6.934,12.37) ; v1(-9.851,-16.22) -9.306,-16.765 -7.835,-16.765 ; GYRO.2 -7.946,-9.957 v1(-6.701,-9.957) ; MPU9250.20 -6.259,6.264 -6.107,6.417 -6.107,7.762 v1(-6.045,7.823) -5.431,7.209 MPU9250.18 ; LED1.2 -1.449,-9.831 v1(-0.914,-10.365) ; -2.835,-16.765 -4.243,-16.765 v1(-4.75,-17.272) -4.75,-17.162 -4.384,-16.796 -4.384,-15.631 -2.527,-15.631 -1.26,-16.897 2.01,-16.897 ; v1(-0.173,-8.633) -0.173,-9.474 0.088,-9.735 LED3.2 ; v1(5.506,-6.635) 5.506,-9.751 LED2.2
  Bottom Layer w0.203: v1(-13.081,9.169) -13.035,9.215 -11.544,9.215 Atmega1.62 ; C12.2 -9.85,-10.99 -9.597,-11.244 v1(-9.597,-11.354) ; C2.1 -9.806,-7.904 v1(-9.399,-8.31) ; C8.1 -9.068,-19.825 -7.671,-21.223 v1(-7.671,-21.311) ; Atmega1.81 -7.335,12.831 -6.934,12.43 v1(-6.934,12.37) ; RS.4 v1(-3.708,-4.623) ; C4.1 -5.66,-13.533 v1(-5.66,-12.041) ; C7.1 -2.591,-21.59 v1(-1.803,-22.377) ; v1(-1.143,13.157) 0.206,14.506 0.394,14.506 1.665,15.777 Atmega1.99 ; v1(-0.835,0.536) Atmega1.32 ; v1(-0.279,10.617) -0.169,10.617 -0.033,10.754 Atmega1.11 ; C9.1 0.101,-2.871 v1(1.215,-1.757) ; C11.1 3.541,-11.247 v1(4.009,-11.714) ; v1(4.546,-14.431) C3.1 ; C10.1 4.91,-3.793 v1(5.436,-4.318) ; C5.1 12.843,8.602 12.843,9.431 13.106,9.694 v1(13.106,9.804) ; C6.1 12.852,4.597 v1(12.852,3.15)
"Gyro On": C6.2 C7.2 Gyro.1 MPU9250.1 MPU9250.8 MPU9250.13 R1.1 | length 76.3
  Top Layer w0.203: v1(-5.715,-20.041) -5.715,-15.348 -5.075,-14.708 -5.075,-9.908 -5.837,-9.146 -5.837,-5.006 -6.726,-4.117 -6.726,0.074 -7.614,0.962 -7.614,7.239 -6.041,8.812 -3.42,8.812 -2.962,8.355 MPU9250.13 -2.962,7.136 -1.164,7.136 -0.3,6.272 -0.3,5.809 -0.547,5.563 -0.547,4.99 v1(-0.584,4.953) ; MPU9250.1 -4.962,3.478 -4.399,2.915 -2.623,2.915 v1(-0.584,4.953) ; MPU9250.8 -0.805,5.064 -0.694,4.953 v1(-0.584,4.953)
  Bottom Layer w0.203: v1(-5.715,-20.041) -5.715,-20.151 -5.41,-20.456 C7.2 ; v1(-0.584,4.953) 0.084,4.953 0.387,5.256 0.944,5.256 2.976,3.224 5.534,3.224 6.839,4.529 6.839,5.527 R1.1 8.895,5.527 9.494,4.928 C6.2 10.796,5.713 10.999,5.916 13.289,5.916 14.044,5.162 20.419,5.162 21.27,4.311 Gyro.1
MISO: Atmega1.22 BURN.1 | length 20
  Top Layer w0.203: BURN.1 3.002,19.858 3.002,14.375 2.494,13.867 1.96,13.867 1.536,13.442 1.536,5.83 v1(2.184,5.182)
  Bottom Layer w0.203: v1(2.184,5.182) 2.22,5.218 3.799,5.218 Atmega1.22
MOSI: Atmega1.21 BURN.2 | length 20.2
  Top Layer w0.203: BURN.2 3.785,13.712 4.846,12.651 5.875,12.651 6.92,11.606 6.92,6.812 v1(5.872,5.764)
  Bottom Layer w0.203: Atmega1.21 5.862,5.754 v1(5.872,5.764)
"Net3.3V P_1": "3.3V P.1" R15.2 | length 9.2
  Top Layer w0.203: v1(-0.051,-19.736) 1.928,-19.736 2.01,-19.817
  Bottom Layer w0.203: v1(-0.051,-19.736) 0.411,-19.736 0.71,-19.436 4.838,-19.436 5.256,-19.855 5.256,-20.023 5.107,-20.172 R15.2
"Net5V P_1": "5V P.1" R12.2 | length 49.1
  Top Layer w0.203: v1(-14.016,-13.21) -14.016,2.64 -8.885,7.771 -8.885,11.53 -5.821,11.53 -3.306,14.044 R12.2 ; v1(-4.572,-18.745) -4.494,-18.823 -4.067,-18.823 -3.205,-19.685 -2.835,-19.685
  Bottom Layer w0.203: v1(-14.016,-13.21) -12.746,-14.48 -12.746,-15.877 -9.907,-18.716 -4.602,-18.716 v1(-4.572,-18.745)
"Net9V P_1": "9V P.1" R9.2 | length 16.2
  Top Layer w0.203: R9.2 -8.869,-7.266 -8.431,-7.266 -6.117,-9.58 -6.117,-10.721 -6.269,-10.873 -6.269,-19.411 -6.544,-19.685 -7.835,-19.685
NetC1_2: C1.2 RESET.3 | length 61.1
  Top Layer w0.203: C1.2 -8.28,14.884 v1(-8.28,13.183)
  Bottom Layer w0.203: v1(-8.28,13.183) -10.257,15.159 -10.257,18.591 -8.301,20.547 -2.002,20.547 0.614,23.163 6.964,23.163 7.879,22.249 7.879,20.953 12.171,16.661 12.171,14.044 13.416,12.8 18.826,12.8 22.89,8.736 22.89,7.034 23.296,6.628 23.296,0.817 RESET.3
NetC8_2: C8.2 MPU9250.10 | length 41.4
  Top Layer w0.203: v1(-10.973,-21.311) -12.721,-19.563 -12.721,-13.159 -13.635,-12.245 -13.635,0.43 v1(-9.698,4.367) ; MPU9250.10 -1.282,5.864 -1.055,6.091 v1(-0.945,6.091)
  Bottom Layer w0.203: v1(-10.973,-21.311) -10.973,-21.201 -10.794,-21.022 C8.2 ; v1(-9.698,4.367) -7.69,6.375 -3.397,6.375 -3.357,6.336 -1.267,6.336 -1.022,6.091 v1(-0.945,6.091)
NetGYRO_1: GYRO.1 R1.2 | length 75.7
  Top Layer w0.203: v1(-9.292,-14.912) -9.292,-13.234 -8.885,-12.828 GYRO.1
  Bottom Layer w0.203: v1(-9.292,-14.912) -8.404,-15.8 -7.081,-15.8 -5.93,-14.649 -2.823,-14.649 -2.417,-15.055 11.596,-15.055 12.908,-13.743 12.908,-6.809 14.356,-5.361 19.309,-5.361 20.401,-6.453 22.941,-6.453 23.525,-5.869 23.525,-5.336 22.407,-4.218 21.595,-4.218 21.112,-3.736 21.112,1.611 22.903,3.402 22.903,5.21 21.315,5.21 19.187,7.339 13.822,7.339 13.263,6.78 9.604,6.78 8.92,7.464 R1.2
NetLED1_1: LED1.1 R17.2 | length 22.4
  Top Layer w0.203: LED1.1 -4.032,-12.751 -4.466,-13.184 -4.466,-14.708 -5.334,-15.577 -5.334,-19.479 -3.704,-21.109 -2.408,-21.109 0.563,-18.137 2.062,-18.137 3.051,-19.126 4.216,-19.126 4.49,-18.852 v1(4.538,-18.852)
  Bottom Layer w0.203: R17.2 4.538,-17.302 v1(4.538,-18.852)
NetLED2_1: LED2.1 R18.2 | length 41.5
  Top Layer w0.203: R18.2 2.101,14.374 1.681,14.374 1.046,13.739 1.046,-0.002 0.563,-0.484 -2.82,-0.484 -3.81,-1.474 -4.097,-1.474 -4.464,-1.841 -4.464,-2.325 -4.122,-2.667 -3.638,-2.667 -3.296,-2.325 -3.296,-2.037 -2.987,-1.729 0.36,-1.729 4.526,-5.895 4.526,-10.507 5.668,-11.649 LED2.1
NetLED3_1: LED3.1 R20.2 | length 12.7
  Top Layer w0.203: v1(-1.016,-18.72) -1.016,-18.649 -0.123,-17.756 2.9,-17.756 3.154,-17.502 3.154,-13.525 2.283,-12.655 LED3.1
  Bottom Layer w0.203: v1(-1.016,-18.72) -1.016,-18.61 -0.707,-18.301 R20.2
NetR2_2: R2.2 RESET.1 | length 57.3
  Top Layer w0.203: R2.2 -7.995,-1.655 -7.491,-2.159 -7.491,-3.891 -6.909,-4.473 v1(-6.909,-5.893)
  Bottom Layer w0.203: v1(-6.909,-5.893) -1.467,-5.893 -0.732,-5.158 -0.732,-2.212 0.335,-1.145 5.46,-1.145 5.467,-1.152 5.631,-1.152 10.002,-5.523 10.171,-5.523 11.511,-4.183 11.511,-3.679 12.75,-2.44 12.851,-2.44 15.01,-0.281 19.156,-0.281 19.994,-1.119 19.994,-3.51 RESET.1
NetR3_2: R3.2 TX.1 | length 8.9
  Top Layer w0.203: v1(3.607,-21.514) 5.013,-20.108 6.002,-20.108 TX.1
  Bottom Layer w0.203: R3.2 0.205,-20.481 0.868,-19.817 2.3,-19.817 3.196,-20.713 3.196,-21.063 3.607,-21.474 v1(3.607,-21.514)
NetR4_1: R4.1 TX.2 | length 26.2
  Top Layer w0.203: TX.2 7.371,-16.897 7.574,-16.694 v1(7.574,-16.021)
  Bottom Layer w0.203: R4.1 -10.745,-16.842 -9.5,-18.087 -4.593,-18.087 -2.527,-16.021 v1(7.574,-16.021)
NetR5_2: R5.2 RX.1 | length 4.9
  Top Layer w0.203: v1(8.153,-19.787) 10.013,-19.787 RX.1
  Bottom Layer w0.203: v1(8.153,-19.787) 8.993,-18.947 R5.2
NetR6_1: R6.1 RX.2 | length 35.6
  Top Layer w0.203: RX.2 11.207,-16.897 11.669,-16.436 11.669,9.148 12.476,9.955 12.476,13.092 11.455,14.112 10.856,14.112 v1(10.846,14.122)
  Bottom Layer w0.203: R6.1 10.413,14.555 v1(10.846,14.122)
NetR7_1: R7.1 R8.2 | length 11.4
  Bottom Layer w0.203: R8.2 -5.124,-8.943 -1.309,-8.943 -0.268,-7.901 3.617,-7.901 R7.1
PE3: Atmega1.5 Servo.3 | length 18.3
  Top Layer w0.203: Servo.3 -1.247,22.604 4.602,22.604 4.721,22.485 5.161,14.699 v1(5.69,13.64)
  Bottom Layer w0.203: Atmega1.5 3.873,13.715 5.614,13.715 v1(5.69,13.64)
PE4: Atmega1.6 R17.1 | length 40.5
  Top Layer w0.203: v1(2.189,13.257) 2.189,12.073 3.259,11.004 5.339,11.004 6.151,10.191 6.151,9.498 5.288,8.634 5.288,5.154 3.205,3.072 3.205,-3.507 8.158,-8.46 8.158,-17.096 v1(7.752,-17.502)
  Bottom Layer w0.203: v1(2.189,13.257) 2.192,13.254 Atmega1.6 ; R17.1 6.292,-17.502 v1(7.752,-17.502)
PE5: Atmega1.7 R18.1 | length 6.5
  Top Layer w0.203: v1(0.165,12.495) R18.1
  Bottom Layer w0.203: v1(0.165,12.495) 2.799,12.495 3.057,12.754 Atmega1.7
PF0: Atmega1.97
PF1: Atmega1.96
PF2: Atmega1.95
PG5: Atmega1.1 R20.1 | length 47
  Top Layer w0.203: v1(3.429,-18.542) 3.429,-18.432 3.657,-18.204 3.657,-18.052 3.876,-17.833 4.78,-17.833 5.212,-18.265 7.929,-18.264 8.539,-17.655 8.539,1.827 9.809,3.097 9.809,12.502 v1(6.558,15.754)
  Bottom Layer w0.203: R20.1 1.23,-17.312 1.733,-17.815 2.847,-17.815 3.064,-18.032 3.064,-18.067 3.429,-18.432 v1(3.429,-18.542) ; Atmega1.1 v1(6.558,15.754)
"RD + (OBC-ADCS)": J1.17 RS.5 | length 74
  Top Layer w0.203: v1(-8.611,-4.369) -9.239,-4.369 -9.825,-4.955 -9.825,-7.294 -10.435,-7.904 -10.435,-16.588 -9.673,-17.35 -9.673,-21.058 -8.479,-22.252 -6.803,-22.252 -5.694,-23.361 0.166,-23.361 3.816,-19.71 4.712,-19.71 5.477,-18.945 11.573,-18.945 12.05,-18.468 12.05,5.131 J1.17
  Bottom Layer w0.203: RS.5 -8.975,-4.623 -8.721,-4.369 v1(-8.611,-4.369)
"RD - (OBC-ADCS)": J1.15 RS.6 | length 73.8
  Top Layer w0.203: v1(-12.962,-3.353) -12.962,-10.708 -12.238,-11.432 -12.238,-17.35 -10.206,-19.382 -10.206,-21.16 -8.504,-22.862 -6.904,-22.862 -5.964,-23.802 2.494,-23.802 5.432,-20.863 11.259,-20.863 12.431,-19.691 12.431,-14.751 13.924,-13.258 13.924,4.465 J1.15
  Bottom Layer w0.203: v1(-12.962,-3.353) RS.6
RESET: Atmega1.30 BURN.4 RESET.2 | length 66
  Top Layer w0.203: v1(3.789,1.319) 6.405,1.319 8.564,3.478 8.564,12.555 5.974,15.146 5.974,18.724 BURN.4 12.838,17.642 12.838,13.657 13.492,13.003 19.156,13.003 20.223,11.936 20.223,10.565 22.915,7.872 22.915,6.323 21.899,5.307 21.29,5.307 21.087,5.104 21.087,-2.062 RESET.2
  Bottom Layer w0.203: Atmega1.30 0.165,1.243 0.419,0.989 3.459,0.989 v1(3.789,1.319)
RXD0: Atmega1.2
RXD1: Atmega1.45
RXD2: Atmega1.12 R6.2 RS.2 | length 29.2
  Top Layer w0.203: v1(-3.88,-2.083) -2.662,-0.865 1.275,-0.865 1.681,-0.459 1.681,2.208 4.373,4.9 4.373,8.669 v1(5.466,9.761)
  Bottom Layer w0.203: RS.2 v1(-3.88,-2.083) ; Atmega1.12 5.332,10.254 5.466,10.387 ; v1(5.466,9.761) 5.466,10.387 ; R6.2 8.687,13.609 5.466,10.387
RXD3: Atmega1.63
SCK: Atmega1.20 BURN.3 | length 19.6
  Bottom Layer w0.203: Atmega1.20 4.729,6.254 4.958,6.482 4.958,7.872 8.107,11.022 8.107,12.317 9.53,13.74 9.53,18.41 BURN.3
SCL: Atmega1.43 MPU9250.23 R10.2 | length 26
  Top Layer w0.203: MPU9250.23 -6.427,5.064 -6.621,5.258 v1(-6.731,5.258) -6.731,5.214 -7.14,4.805 -7.14,3.297 -6.269,2.426 -6.269,-3.993 -2.617,-7.645 v1(-1.342,-7.645)
  Bottom Layer w0.203: v1(-6.731,5.258) -6.7,5.227 -6.7,4.648 -5.814,3.762 -5.814,3.594 -6.335,3.073 Atmega1.43 Atmega1.43@-6.297,2.045 ; R10.2 -4.014,-7.058 -3.871,-7.201 -3.871,-7.949 -3.707,-8.112 -1.809,-8.112 v1(-1.342,-7.645)
SDA: Atmega1.44 MPU9250.24 R11.2 | length 29.7
  Top Layer w0.203: v1(-6.556,3.678) -6.541,3.693 -6.541,4.288 -6.165,4.664 MPU9250.24@-5.71,4.664 ; MPU9250.24 MPU9250.24@-5.71,4.664 ; v1(-2.247,-14.268) 0.152,-11.868 0.152,-10.403 -0.757,-9.493 -0.757,-8.391 0.152,-7.481 0.152,-6.909 -0.254,-6.502 -0.318,-6.502 -0.66,-6.16 -0.66,-6.096 -2.945,-3.812 -4.903,-3.812 -5.626,-3.089 -5.626,1.438 -5.71,1.522 MPU9250.24@-5.71,4.664
  Bottom Layer w0.203: Atmega1.44 -6.835,3.289 -6.556,3.568 v1(-6.556,3.678) ; R11.2 -3.122,-13.997 -2.852,-14.268 v1(-2.247,-14.268)
SS: Atmega1.19
"TD + (OBC-ADCS)": J1.13 R14.2 RS.8 | length 46.5
  Top Layer w0.203: J1.13 17.018,5.019 v1(17.018,10.058)
  Bottom Layer w0.203: RS.8 -8.731,-0.813 -8.249,-0.33 -7.71,-0.33 -7.428,-0.048 3.895,-0.048 7.117,3.173 11.126,3.173 12.369,1.93 13.929,1.93 J1.13 ; R14.2 9.937,12.521 10.215,12.8 12.857,12.8 13.238,12.419 16.184,12.419 17.018,11.585 v1(17.018,10.058)
"TD - (OBC-ADCS)": J1.11 R14.1 RS.7 | length 39
  Top Layer w0.203: v1(10.973,9.906) 11.026,9.853 11.026,2.439 v1(11.079,2.386)
  Bottom Layer w0.203: RS.7 -9.442,-2.083 -8.835,-1.475 -3.431,-1.475 -2.385,-0.429 4.81,-0.429 7.942,2.703 10.573,2.703 v1@10.985,2.292 ; v1(10.973,9.906) 10.973,9.973 11.371,10.37 11.371,11.13 R14.1 ; v1(11.079,2.386) v1@10.985,2.292 ; J1.11 12.078,1.199 v1@10.985,2.292
TXD0: Atmega1.3
TXD1: Atmega1.46
TXD2: Atmega1.13 R4.2 RS.3 | length 38.7
  Top Layer w0.203: v1(-12.235,-10.609) -12.235,-7.716 -12.467,-7.484 -12.467,-4.701 -10.079,-2.313 v1(-8.504,-2.313) -8.504,6.831 v1(-8.581,6.907)
  Bottom Layer w0.203: R4.2 -12.471,-10.955 -12.235,-10.719 v1(-12.235,-10.609) ; v1(-8.581,6.907) -5.734,9.754 Atmega1.13 ; v1(-8.504,-2.313) -7.465,-3.353 RS.3
TXD3: Atmega1.64
VBAT: J2.17 J2.19 | length 2.5
  Top Layer w0.203: J2.17 J2.19
VCC-5V(ADCS): Atmega1.10 Atmega1.31 Atmega1.61 Atmega1.80 Atmega1.100 C2.2 C3.2 C4.2 C5.2 C12.1 J2.6 POWER.2 R2.1 R3.1 R5.1 R10.1 R11.1 R12.1 RS.1 Servo.2 | length 34.1
  Top Layer w0.203: R2.1 -9.931,9.258 -9.779,9.106 v1(-9.779,7.925) ; v1(-5.359,13.157) -5.359,14.873 R12.1
  Bottom Layer w0.203: v1(-11.532,-8.31) C2.2 ; Atmega1.61 -11.467,8.715 -10.717,8.715 -10.005,8.003 -9.857,8.003 v1(-9.779,7.925) ; C12.1 -8.124,-10.903 -7.747,-11.28 v1(-7.747,-11.379) ; v1(-8.077,19.202) -8.077,19.092 -7.835,18.851 Atmega1.80 ; C4.2 -7.323,-13.606 v1(-7.323,-15.216) ; RS.1 -5.931,-0.8 -4.001,-0.8 v1(-3.988,-0.787) ; R10.1 -1.224,-7.058 -0.085,-5.918 v1(-0.076,-5.918) ; v1(-1.186,-14.335) R11.1 ; Atmega1.31 v1(-0.335,3.657) ; v1(0.94,-14.148) 1.778,-13.31 C3.2 ; v1(2.108,-23.217) 2.108,-21.468 R3.1 ; Atmega1.100 2.187,17.446 2.187,19.408 v1(2.21,19.431) ; Atmega1.10 5.386,11.254 v1(5.893,11.76) ; v1(9.225,9.474) 9.303,9.396 9.566,9.396 10.669,8.293 C5.2 ; R5.1 10.93,-18.692 v1(11.767,-19.529)
VCC-9V(ADCS): POWER.1 R9.1 | length 16.1
  Top Layer w0.203: v1(-11.506,-9.881) -10.947,-9.322 -10.947,-7.877 -10.805,-7.735 R9.1
  Bottom Layer w0.203: POWER.1 -20.445,-7.622 -13.222,-7.622 -11.573,-9.271 -11.573,-9.814 v1(-11.506,-9.881)
XTAL1: Atmega1.34 C11.2 R8.1 Y1.2 | length 53.2
  Top Layer w0.203: v1(9.123,-6.949) 10.058,-6.014 10.058,-4.623 v1(10.008,-4.572)
  Bottom Layer w0.203: Atmega1.34 -1.835,1.308 -2.81,0.333 -7.586,0.333 -7.766,0.152 -11.576,0.152 -12.314,-0.586 -12.314,-2.415 -12.035,-2.694 -9.343,-2.694 -7.713,-4.324 -7.713,-5.99 -6.015,-7.688 -6.015,-11.076 -3.399,-11.076 R8.1 -3.188,-10.949 1.604,-10.949 C11.2 1.604,-9.12 1.884,-8.841 7.675,-8.841 8.941,-7.576 8.941,-7.242 9.123,-7.059 v1(9.123,-6.949) ; v1(10.008,-4.572) 10.008,-0.907 Y1.2
XTAL2: Atmega1.33 C10.2 R7.2 Y1.1 | length 64.2
  Top Layer w0.203: v1(0.081,6.717) 0.081,5.03 0.259,4.852 0.259,3.275 -0.522,2.494 -2.274,2.494 -5.245,-0.476 -5.245,-2.931 -4.745,-3.431 -0.047,-3.431 v1(1.884,-5.361)
  Bottom Layer w0.203: Atmega1.33 -1.335,4.361 -1.454,4.48 -1.914,4.48 -3.389,5.955 -3.515,5.955 -3.555,5.994 -7.532,5.994 -9.114,4.412 -9.114,4.125 -9.456,3.783 -9.94,3.783 -10.282,4.125 -10.282,4.609 -9.163,5.729 -8.933,5.729 -7.813,6.848 -3.331,6.848 -3.2,6.717 v1(0.081,6.717) ; C10.2 2.974,-3.941 1.884,-5.031 v1(1.884,-5.361) R7.2 2.112,-5.59 8.59,-5.59 10.044,-7.044 Y1.1
pads on no net: Atmega1.4 Atmega1.8 Atmega1.9 Atmega1.14 Atmega1.15 Atmega1.16 Atmega1.17 Atmega1.23 Atmega1.24 Atmega1.25 Atmega1.26 Atmega1.27 Atmega1.28 Atmega1.29 Atmega1.35 Atmega1.36 Atmega1.37 Atmega1.38 Atmega1.39 Atmega1.40 Atmega1.41 Atmega1.42 Atmega1.47 Atmega1.48 Atmega1.49 Atmega1.50 Atmega1.51 Atmega1.52 Atmega1.53 Atmega1.54 Atmega1.55 Atmega1.56 Atmega1.57 Atmega1.58 Atmega1.59 Atmega1.60 Atmega1.65 Atmega1.66 Atmega1.67 Atmega1.68 Atmega1.69 Atmega1.70 Atmega1.71 Atmega1.72 Atmega1.73 Atmega1.74 Atmega1.75 Atmega1.76 Atmega1.77 Atmega1.78 Atmega1.79 Atmega1.82 Atmega1.83 Atmega1.84 Atmega1.85 Atmega1.86 Atmega1.87 Atmega1.88 Atmega1.89 Atmega1.90 Atmega1.91 Atmega1.92 Atmega1.93 Atmega1.94 J1.1 J1.2 J1.3 J1.4 J1.5 J1.6 J1.7 J1.8 J1.18 J2.2 J2.3 J2.4 J2.5 J2.7 J2.9 J2.12 J2.13 J2.14 J2.15 MPU9250.2 MPU9250.3 MPU9250.4 MPU9250.5 MPU9250.6 MPU9250.7 MPU9250.9 MPU9250.11 MPU9250.12 MPU9250.14 MPU9250.15 MPU9250.16 MPU9250.17 MPU9250.19 MPU9250.21 MPU9250.22 MPU9250.25

## Polygon pours and split planes (outlines as drawn)
G on Ground (split plane): 233 vertices, not listed, extent -24.492,-24.491 24.491,24.492
VCC-5V(ADCS) on Power (split plane): 233 vertices, not listed, extent -24.492,-24.491 24.491,24.492

## Silkscreen, mask and mechanical layers (free items; w line width, h text height)
Mechanical 1:
  circle w0.254: c-0.001,0 r25